# EAGLE board Esquematico ODJ-Raptor (EAGLE 6.5.0)
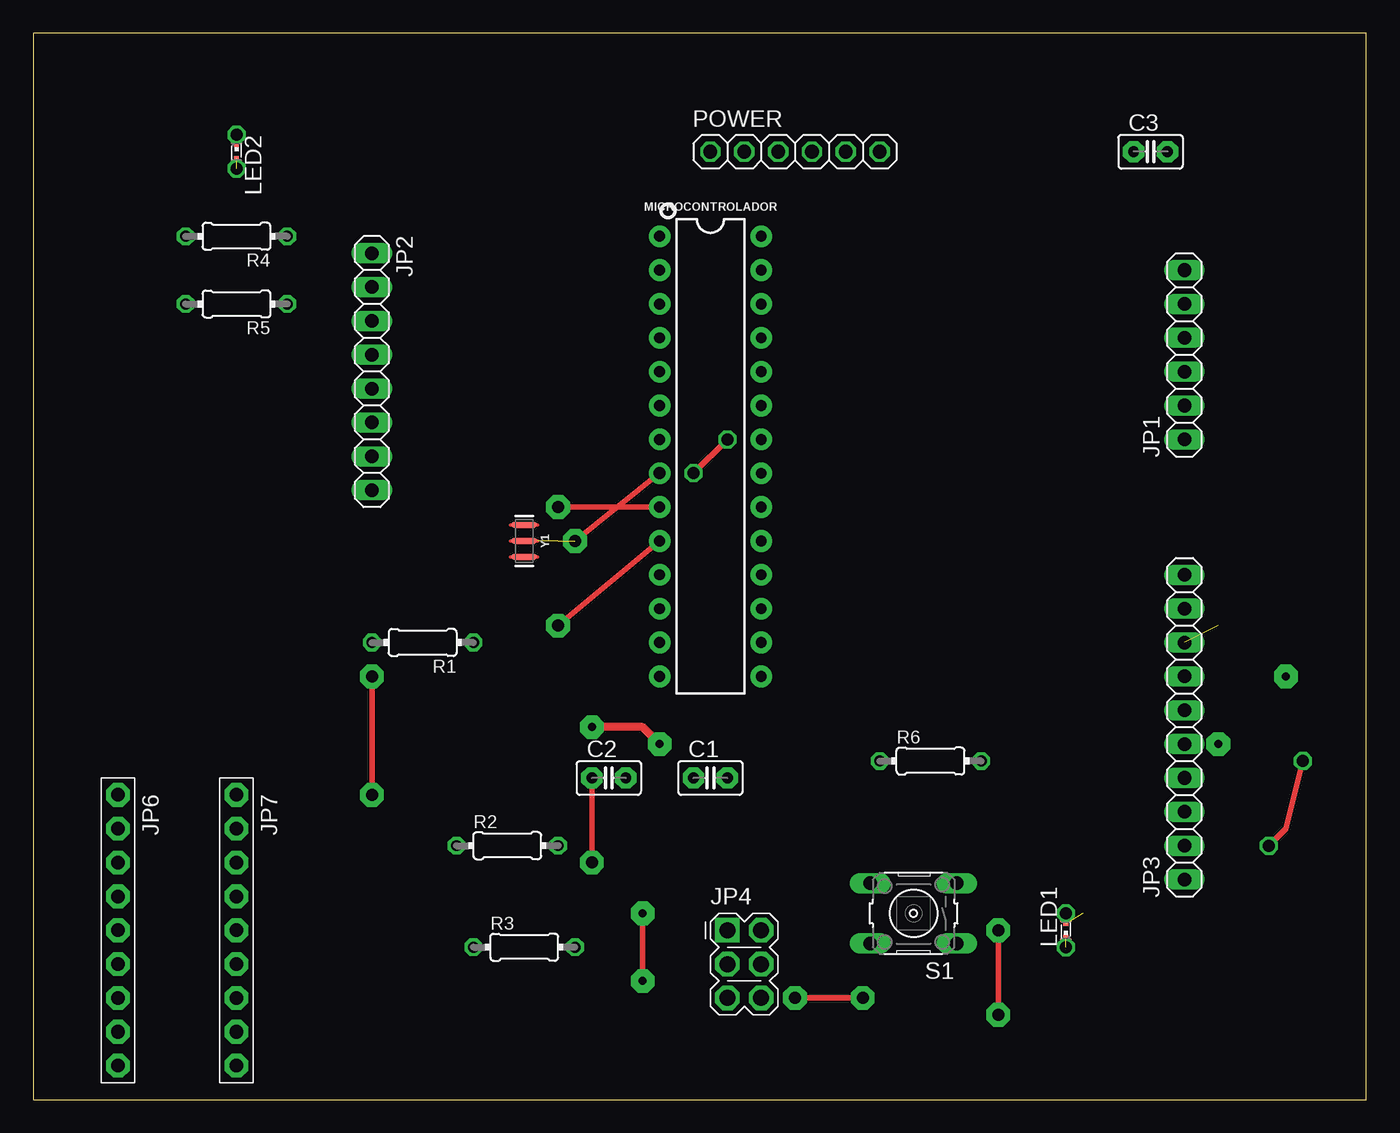
[diagram p0: board, top side]
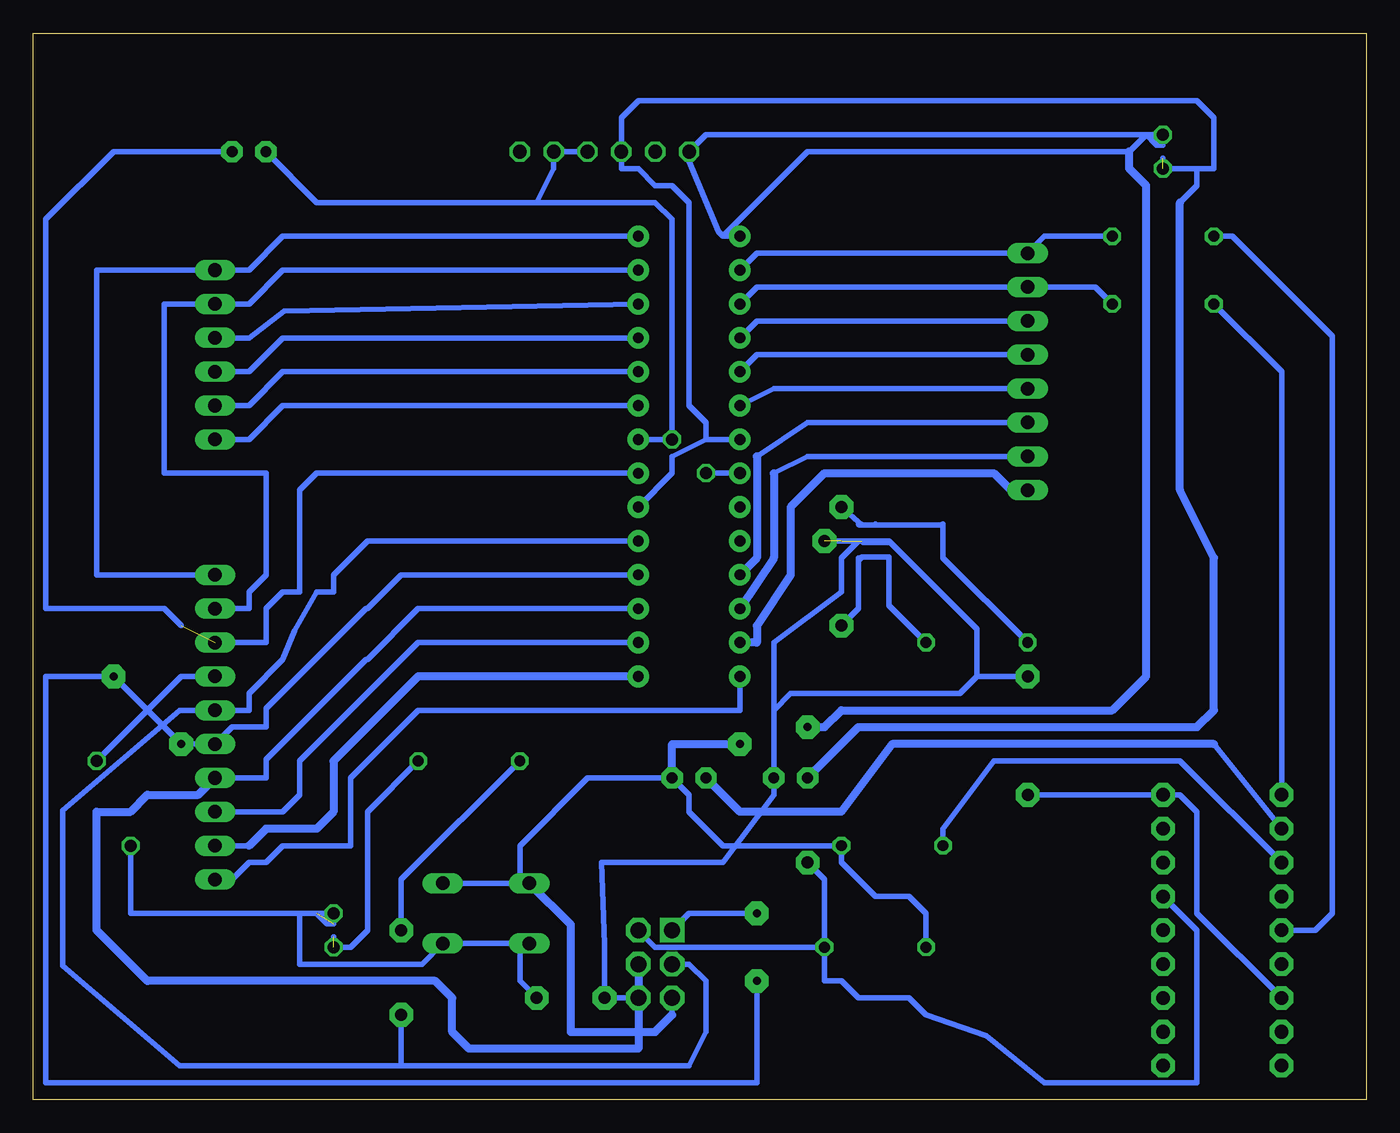
[diagram p1: board, bottom side, seen from below]

Size 100 x 80 mm. Coordinates in mm from the lower left corner, seen from the top.
Outline: 0,0 100,0 100,80 0,80 0,0
Copper layers (1*16): Top 0.035mm / dielectric 1.5mm / Bottom 0.035mm
Design rules "default": minimum track width 10mil, minimum drill 24mil, track to track 8mil, track to pad 8mil, pad to pad 8mil, via to via 8mil, smd to smd 8mil, copper to edge 40mil, drill to drill 8mil, minimum pad ring 10mil, minimum via ring 8mil, stop-mask expansion 4mil, vias tented up to drill 0mil, thermal gap 10mil

## Footprints (pad centres in the part's own frame; a part is rotated, then mirrored left to right if it is on the bottom)
C2.5-2 = drill 0.813 pad 1.6 octagon: 1 -1.27,0; 2 1.27,0
1X06 = drill 1.016 long: 1 -6.35,0; 2 -3.81,0; 3 -1.27,0; 4 1.27,0; 5 3.81,0; 6 6.35,0
1X08 = drill 1.016 long: 1 -8.89,0; 2 -6.35,0; 3 -3.81,0; 4 -1.27,0; 5 1.27,0; 6 3.81,0; 7 6.35,0; 8 8.89,0
1X10 = drill 1.016 long: 1 -11.43,0; 2 -8.89,0; 3 -6.35,0; 4 -3.81,0; 5 -1.27,0; 6 1.27,0; 7 3.81,0; 8 6.35,0; 9 8.89,0; 10 11.43,0
CONN-2X03 = drill 1.2 pad 1.829 square: 1 0,0 | drill 1.2 pad 1.829 octagon: 2 2.54,0; 3 0,-2.54; 4 2.54,-2.54; 5 0,-5.08; 6 2.54,-5.08
1X09-BIG = drill 1.016 pad 1.778 octagon: 1 -10.16,0; 2 -7.62,0; 3 -5.08,0; 4 -2.54,0; 5 0,0; 6 2.54,0; 7 5.08,0; 8 7.62,0; 9 10.16,0
SMARTLED-TTW = smd 0.8 x 0.5: A 0,-0.875; C 0,0.875 | smd 0.35 x 0.35: A@1 0,-0.5; C@1 0,0.5
DIP28 = drill 0.813 pad 1.626: 1 -16.51,-3.81; 2 -13.97,-3.81; 3 -11.43,-3.81; 4 -8.89,-3.81; 5 -6.35,-3.81; 6 -3.81,-3.81; 7 -1.27,-3.81; 8 1.27,-3.81; 9 3.81,-3.81; 10 6.35,-3.81; 11 8.89,-3.81; 12 11.43,-3.81; 13 13.97,-3.81; 14 16.51,-3.81; 15 16.51,3.81; 16 13.97,3.81; 17 11.43,3.81; 18 8.89,3.81; 19 6.35,3.81; 20 3.81,3.81; 21 1.27,3.81; 22 -1.27,3.81; 23 -3.81,3.81; 24 -6.35,3.81; 25 -8.89,3.81; 26 -11.43,3.81; 27 -13.97,3.81; 28 -16.51,3.81
1X06' = drill 1.016 octagon: 1 -6.35,0; 2 -3.81,0; 3 -1.27,0; 4 1.27,0; 5 3.81,0; 6 6.35,0
0204/7 = drill 0.813 octagon: 1 -3.81,0; 2 3.81,0
B3F-10XX = drill 1.016 long: 1 -3.251,2.261; 2 3.251,2.261; 3 -3.251,-2.261; 4 3.251,-2.261
RESONATOR-SMD-3.2X1.3 = smd 0.45 x 1.905: 1 -1.2,0; 2 0,0; 3 1.2,0

## Placement (x,y rotation side)
C1  100n  [C2.5-2]  50.8,24.13 0 top
C2  100n  [C2.5-2]  43.18,24.13 0 top
C3  100n  [C2.5-2]  83.82,71.12 0 top
JP1  Pines Analogos  [1X06]  86.36,55.88 90 top
JP2  Pines Digitales  [1X08]  25.4,54.61 270 top
JP3  Pines Digitales  [1X10]  86.36,27.94 90 top
JP4  [CONN-2X03]  52.07,12.7 0 top
JP6  [1X09-BIG]  6.35,12.7 270 top
JP7  [1X09-BIG]  15.24,12.7 270 top
LED1  YELLOW  [SMARTLED-TTW]  77.47,12.7 0 top
LED2  [SMARTLED-TTW]  15.24,71.12 180 top
MICROCONTROLADOR  ATMEGA328P-PU  [DIP28]  50.8,48.26 270 top
POWER  [1X06']  57.15,71.12 0 top
R1  1M  [0204/7]  29.21,34.29 180 top
R2  100_NM  [0204/7]  35.56,19.05 0 top
R3  10k  [0204/7]  36.83,11.43 0 top
R4  1k  [0204/7]  15.24,64.77 180 top
R5  1k  [0204/7]  15.24,59.69 180 top
R6  1M  [0204/7]  67.31,25.4 0 top
S1  [B3F-10XX]  66.04,13.97 180 top
Y1  16MHz  [RESONATOR-SMD-3.2X1.3]  36.83,41.91 270 top

## Library data of the parts
C1-C3 = capacitor-wima
JP1-JP3 = pinhead
JP4 = arduino_jw
JP6 JP7 LED1 POWER = adafruit
LED2 = led
MICROCONTROLADOR = SparkFun-IC-Microcontroller; PROD_ID: IC-09136
R1-R6 = resistor
S1 = switch-omron; MPN: B3F-1000; OC_FARNELL: 176432; OC_NEWARK: 36M3542
Y1 = SparkFun-Clocks; PROD_ID: XTAL-08900

## Nets
3.3V: JP7.5
+5V: C2.1 JP4.2 JP7.4 LED2.C@1 MICROCONTROLADOR.7 MICROCONTROLADOR.20 POWER.3 R3.2
AD4: JP1.5 JP3.9 MICROCONTROLADOR.27
AD5: JP1.6 JP3.10 MICROCONTROLADOR.28
AREF: C3.2 JP3.8 MICROCONTROLADOR.21
DTR: C1.1 JP6.2
GND: C2.2 C3.1 JP3.7 JP4.6 JP6.7 JP7.1 LED1.C@1 MICROCONTROLADOR.8 MICROCONTROLADOR.22 POWER.4 POWER.5 S1.1 S1.2 Y1.2
N$1: JP1.1 MICROCONTROLADOR.23
N$2: JP1.2 MICROCONTROLADOR.24
N$3: JP1.3 MICROCONTROLADOR.25
N$4: JP1.4 MICROCONTROLADOR.26
N$7: JP2.1 MICROCONTROLADOR.2 R4.1
N$8: JP2.2 MICROCONTROLADOR.3 R5.1
N$9: JP2.3 MICROCONTROLADOR.4
N$10: JP2.4 MICROCONTROLADOR.5
N$11: JP2.5 MICROCONTROLADOR.6
N$12: JP2.6 MICROCONTROLADOR.11
N$13: JP2.7 MICROCONTROLADOR.12
N$14: JP2.8 MICROCONTROLADOR.13
N$15: JP3.1 MICROCONTROLADOR.14
N$16: JP3.2 MICROCONTROLADOR.15
N$17: JP3.3 MICROCONTROLADOR.16
N$18: JP3.4 JP4.4 MICROCONTROLADOR.17
N$19: JP3.5 JP4.1 MICROCONTROLADOR.18
N$20: JP3.6 JP4.3 MICROCONTROLADOR.19 R6.1
N$21: MICROCONTROLADOR.9 R1.2 Y1.1
N$22: MICROCONTROLADOR.10 R1.1 Y1.3
N$23: C1.2 JP4.5 LED2.A@1 MICROCONTROLADOR.1 POWER.1 R2.2 R3.1 S1.3 S1.4
N$30: LED1.A@1 R6.2
RTS: JP6.3 R2.1
RXD: JP6.5 R4.2
TXD: JP6.1 R5.2

## Tracks (layer width: path | path; a pad name or v marks a point on that pad's centre or on a via)
+5V  (via drill 0.6 pad 1.78, 0.9)  (1 unrouted)
  Top 0.406: v41.91,17.78 C2.1
  Bottom 0.406: MICROCONTROLADOR.20 52.07,46.99 52.07,48.26 49.53,49.53 | 49.53,49.53 MICROCONTROLADOR.7 | 49.53,49.53 49.53,50.8 50.8,52.07 50.8,67.31 52.07,68.58 53.34,68.58 54.61,69.85 55.88,69.85 POWER.3 55.88,73.66 54.61,74.93 12.7,74.93 11.43,73.66 11.43,69.85 12.7,69.85 | R3.2 53.34,11.43 JP4.2 | JP7.4 12.7,12.7 12.7,1.27 24.13,1.27 28.5,4.76 33.02,6.35 34.29,7.62 38.1,7.62 39.37,8.89 40.64,8.89 R3.2 | R3.2 40.64,16.51 v41.91,17.78 | 13.97,67.31 12.7,68.58 12.7,69.85 | 12.7,69.85 15.24,69.85 LED2.C@1
  Bottom 0.61: C2.1 38.1,27.94 12.7,27.94 11.43,29.21 11.43,40.64 13.97,45.72 13.97,67.31
AD4
  Bottom 0.406: MICROCONTROLADOR.27 81.28,62.23 83.82,59.69 JP1.5 90.17,59.69 90.17,46.99 82.55,46.99 82.55,39.37 83.82,38.1 83.82,36.83 JP3.9
AD5
  Bottom 0.406: MICROCONTROLADOR.28 81.28,64.77 83.82,62.23 JP1.6 95.25,62.23 95.25,39.37 JP3.10
AREF  (1 unrouted)
  Bottom 0.406: MICROCONTROLADOR.21 78.74,46.99 80.01,45.72 80.01,38.1 81.28,38.1 82.55,36.83 82.55,34.29 JP3.8 | C3.2 93.98,71.12 99.06,66.04 99.06,36.83 90.17,36.83 88.9,35.56
DTR
  Bottom 0.406: JP6.2 11.43,26.67
  Bottom 0.61: 11.43,26.67 35.56,26.67 39.37,21.59 46.99,21.59 C1.1
GND  (via drill 0.6 pad 1.78, 0.9)  (3 unrouted)
  Top 0.406: v95.25,25.4 93.98,20.32 v92.71,19.05 | v49.53,46.99 v52.07,49.53 | v25.4,22.86 v25.4,31.75 | v57.15,7.62 v62.23,7.62 | MICROCONTROLADOR.8 v40.64,41.91
  Bottom 0.406: JP3.7 88.9,31.75 v95.25,25.4 | v92.71,19.05 92.71,13.97 80.01,13.97 | 80.01,13.97 78.74,13.97 | 80.01,13.97 80.01,10.16 70.84,10.16 S1.1 S1.2 63.5,11 63.5,8.89 v62.23,7.62 | MICROCONTROLADOR.22 v52.07,49.53 52.07,66.04 53.34,67.31 62.23,67.31 | MICROCONTROLADOR.8 v49.53,46.99 | C3.1 78.74,67.31 62.23,67.31 | 62.23,67.31 60.96,69.85 POWER.5 POWER.4 | 78.74,13.97 77.97,13.2 LED1.C@1 v77.47,13.97 78.74,13.97 | JP6.7 12.7,13.97 12.7,21.59 13.97,22.86 JP7.1 v25.4,22.86 | 35.69,41.78 35.81,41.91 37.85,41.91 | 35.69,41.78 29.21,35.31 29.21,31.75 | 29.21,31.75 30.48,30.48 43.18,30.48 44.45,29.21 C2.2 | 37.85,41.91 37.72,41.78 35.69,41.78 | v25.4,31.75 29.21,31.75 | JP4.6 v57.15,7.62 57.15,11.65 57.37,17.78 48.26,17.78 44.45,22.86 C2.2 | C2.2 44.45,34.29 39.37,38.1 39.37,40.64 38.1,41.91 | 37.85,41.91 38.1,41.91 | 38.1,41.91 v40.64,41.91
  other vias: 46.99,46.99
N$1
  Bottom 0.406: MICROCONTROLADOR.23 81.28,52.07 83.82,49.53 JP1.1
N$2
  Bottom 0.406: MICROCONTROLADOR.24 81.28,54.61 83.82,52.07 JP1.2 87.63,52.07
N$3
  Bottom 0.406: MICROCONTROLADOR.25 81.28,57.15 83.82,54.61 JP1.3
N$4
  Bottom 0.406: MICROCONTROLADOR.26 81.2,59.17 83.82,57.15 JP1.4
N$5  (via drill 0.9)
  other vias: 15.24,69.85
N$7
  Bottom 0.406: MICROCONTROLADOR.2 45.72,63.5 JP2.1 24.13,64.77 R4.1
N$8
  Bottom 0.406: MICROCONTROLADOR.3 45.72,60.96 JP2.2 20.32,60.96 R5.1
N$9
  Bottom 0.406: JP2.3 45.72,58.42 MICROCONTROLADOR.4
N$10
  Bottom 0.406: JP2.4 45.72,55.88 MICROCONTROLADOR.5
N$11
  Bottom 0.406: JP2.5 44.45,53.34 MICROCONTROLADOR.6
N$12
  Bottom 0.406: JP2.6 41.91,50.8 45.72,48.26
  Bottom 0.61: 45.72,48.26 45.72,40.64 MICROCONTROLADOR.11
N$13
  Bottom 0.406: JP2.7 41.91,48.26 44.45,46.99
  Bottom 0.61: 44.45,46.99 44.45,40.64 MICROCONTROLADOR.12
N$14
  Bottom 0.61: MICROCONTROLADOR.13 45.72,34.29 45.72,35.56 43.18,39.37 43.18,44.45 40.64,46.99 27.94,46.99 26.67,45.72 JP2.8
N$15
  Bottom 0.406: MICROCONTROLADOR.14 46.99,29.21 71.12,29.21 76.2,24.13 76.2,19.05 81.28,19.05 82.55,17.78 83.82,17.78 85.09,16.51 JP3.1
N$16
  Bottom 0.406: 83.82,19.05 JP3.2
  Bottom 0.61: MICROCONTROLADOR.15 71.12,31.75 77.47,25.4 77.47,21.59 78.74,20.32 82.55,20.32 83.82,19.05
N$17
  Bottom 0.406: MICROCONTROLADOR.16 71.12,34.29 80.01,25.4 80.01,22.86 81.28,21.59 JP3.3
N$18
  Bottom 0.406: MICROCONTROLADOR.17 71.12,36.83 74.93,33.02 75.05,33.02 82.55,25.52 82.55,24.13 JP3.4
  Bottom 0.61: JP4.4 54.61,3.81 67.31,3.81 68.58,5.08 68.58,7.62 69.85,8.89 91.44,8.89 95.25,12.7 95.25,21.59 92.71,21.59 91.44,22.86 87.63,22.86 JP3.4
N$19  (via drill 0.6 pad 1.78)
  Top 0.406: v45.72,13.97 v45.72,8.89
  Bottom 0.406: MICROCONTROLADOR.18 72.39,39.37 74.93,36.83 75.05,36.83 82.55,29.33 82.55,27.94 85.09,27.94 JP3.5 v88.9,26.67 v93.98,31.75 99.06,31.75 99.06,1.27 45.72,1.27 v45.72,8.89 | JP4.1 50.8,13.97 v45.72,13.97
N$20  (via drill 0.6 pad 1.78, 0.9)
  Top 0.406: v72.39,6.35 v72.39,12.7
  Bottom 0.406: MICROCONTROLADOR.19 74.93,41.91 77.47,39.37 77.47,38.1 78.74,38.1 80.38,35.19 81.28,33.02 83.82,30.48 83.82,29.21 JP3.6 89.02,29.21 97.79,21.71 97.79,10.04 89.02,2.54 72.39,2.54 | 72.39,2.54 50.8,2.54 49.53,5.08 49.53,8.89 50.8,10.16 JP4.3 | R6.1 72.39,16.51 v72.39,12.7 | 72.39,2.54 v72.39,6.35
N$21  (via drill 0.6 pad 1.78, 0.9)
  Top 0.406: v39.37,44.45 MICROCONTROLADOR.9
  Bottom 0.406: R1.2 31.75,40.64 31.75,43.18 31.82,43.11 Y1.1 | 37.85,43.11 v39.37,44.45 | 36.83,43.18 Y1.1 | 37.85,43.11 Y1.1 | 37.85,43.11 37.92,43.18 38.1,43.18 38.03,43.11 37.85,43.11
N$22  (via drill 0.6 pad 1.78, 0.9)
  Top 0.406: MICROCONTROLADOR.10 v39.37,35.56
  Bottom 0.406: R1.1 35.81,37.08 35.81,40.71 37.85,40.71 38.1,40.46 | 38.1,40.46 38.1,36.83 v39.37,35.56 | 38.1,40.64 38.1,40.46
N$23  (via drill 0.6 pad 1.78, 0.9)  (1 unrouted)
  Top 0.61: v46.99,26.67 45.72,27.94 v41.91,27.94
  Bottom 0.406: S1.4 63.5,16.23 | 63.5,16.23 S1.3 | 52.07,6.35 JP4.5 | MICROCONTROLADOR.1 48.26,64.77 | 48.26,64.77 48.6,65.11 50.8,70.42 POWER.1 49.53,72.39 16.51,72.39 | 63.5,16.23 63.5,19.05 58.42,24.13 C1.2 50.8,22.86 50.8,21.59 48.26,19.05 R2.2 39.37,17.78 36.83,15.24 34.29,15.24 33.02,13.97 R3.1 | LED2.A@1 v15.24,72.39 16.01,72.39 | 48.26,64.77 41.91,71.12 17.78,71.12 16.51,72.39 | LED2.A@1 16.01,72.39 | 16.01,72.39 16.51,72.39 | 16.51,72.39 15.74,71.62 LED2.A@1
  Bottom 0.61: S1.4 59.69,13.13 59.69,5.08 53.34,5.08 52.07,6.35 | C1.2 52.07,26.67 v46.99,26.67 | v41.91,27.94 40.64,27.94 39.37,29.21 19.05,29.21 16.51,31.75 16.51,68.58 17.78,69.85 17.78,71.12
N$30  (via drill 0.9)  (1 unrouted)
  Top 0.406: LED1.A@1 v77.47,11.43
  Bottom 0.406: R6.2 74.93,21.59 74.93,12.7 76.2,11.43 v77.47,11.43 LED1.A@1
RTS
  Bottom 0.406: JP6.3 13.97,25.4 27.94,25.4 31.75,20.32 R2.1
RXD
  Bottom 0.406: R4.2 10.04,64.77 2.54,57.27 2.54,13.97 3.81,12.7 JP6.5
TXD
  Bottom 0.406: R5.2 6.35,54.61 JP6.1